# Altium PCB ip_phone_pcb.PcbDoc (part 3 of 4)
Units mil, origin at the board's own origin, x right, y up, seen from the top; angles counter-clockwise.
Board outline 2401.57 x 6885.83 mil, 6 copper layers (Component Side, Ground Plane, Inner Layer 1, Inner Layer 2, Power Plane, Solder Side), stack 60.4 mil thick; 371 components, 298 nets, 1249 pads, 735 vias.
Unrouted connection lines stored in the file: 81.
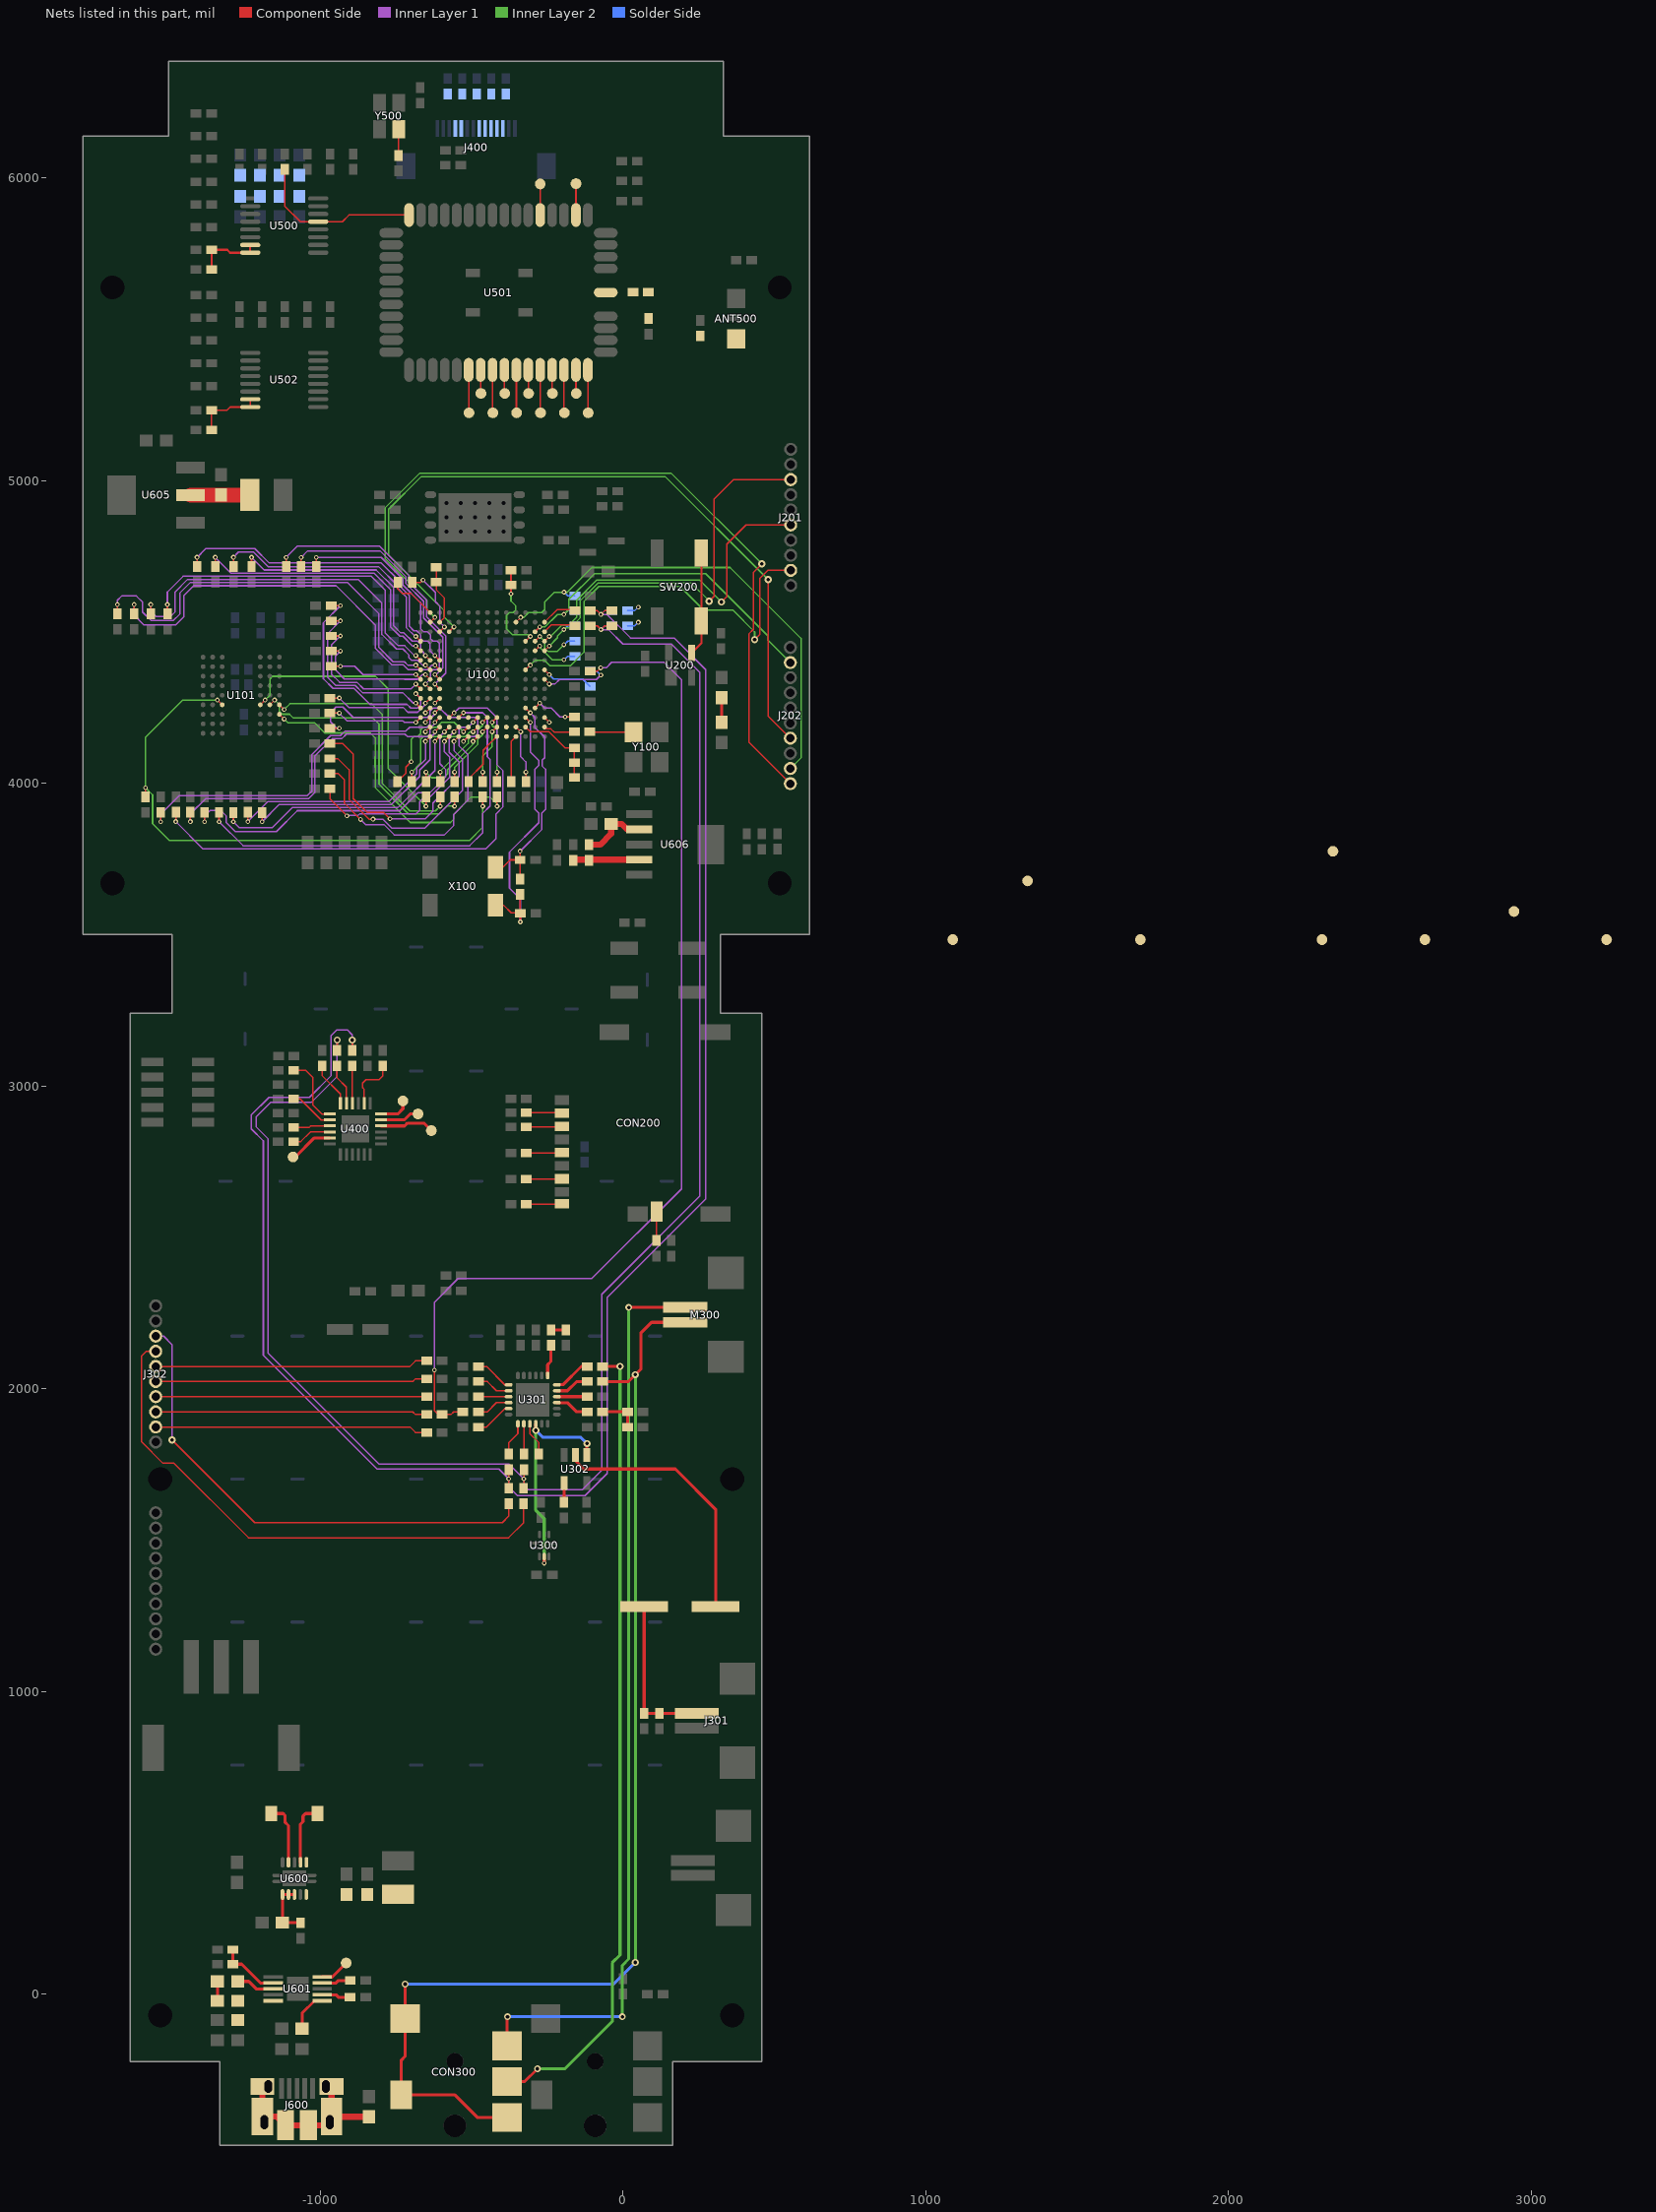
[diagram p7: the nets of this part, all layers, seen from the top]

## Via types
v1: diameter 15.75, hole 7.87, Component Side to Solder Side, tented top, 367 vias
v2: diameter 23.62, hole 11.81, Component Side to Solder Side, 261 vias
v3: diameter 23.62, hole 11.81, Component Side to Solder Side, tented bottom, 44 vias
v4: diameter 31.5, hole 15.75, Component Side to Solder Side, 28 vias
v5: diameter 25.98, hole 12.99, Component Side to Solder Side, tented top, 8 vias
v6: diameter 15.75, hole 7.87, Component Side to Solder Side, 6 vias
v7: diameter 23.62, hole 11.81, Component Side to Solder Side, tented top, 6 vias
v8: diameter 17.72, hole 11.81, Component Side to Solder Side, 5 vias
v9: diameter 19.68, hole 19.68, Component Side to Solder Side, 5 vias
v10: diameter 23.62, hole 11.81, Component Side to Solder Side, tented both sides, 4 vias
v11: diameter 31.5, hole 15.75, Component Side to Solder Side, tented bottom, 1 vias

## Nets (pads, with @x,y where several pads share a name; then routed paths per layer and width w, separated by ;. In a path a pad name is that pad's centre, name@x,y a point inside that pad or via, vN(x,y) a via of type N, cw(c..) or ccw(c..) an arc to the next point about the centre after c; other vN are vias at no path point) (continued)
MDIO: J202.2 R209.2 U100.B3 | length 1112.9
  Component Side w5: U100.B3@-290.53,4501.36 v1(-274.78,4517.11)
  Inner Layer 2 w5: v1(-274.78,4517.11) -257.49,4517.11 -216.21,4558.39 v1(-194.9,4558.39) -178.6,4574.69 -178.6,4608.39 -93.6,4693.39 273.11,4693.39 479.97,4486.54 479.97,4472.39 J202.2@552.97,4399.39
  Solder Side w5: v1@-194.09,4558.39 -182.09,4570.39 R209.2@-159.03,4570.39
MONOOUT: U300.9 U301.16 U302.1 | length 719.4
  Component Side w10: v7(-288.2,1862.6) U301.16@-288.2,1884.33 ; v6(-260.2,1424.06) U300.9@-260.2,1445.79 ; U302.1@-119.64,1780.65 -119.04,1781.25 v2(-119.04,1819.06)
  Inner Layer 2 w10: v7(-288.2,1862.6) -288.2,1598.6 -260.2,1570.6 v6(-260.2,1424.06)
  Solder Side w10: v7(-288.2,1862.6) -265.5,1839.9 -139.89,1839.9 v2(-119.04,1819.06)
NetANT500_A: ANT500.A C505.2 C506.2 R500.1
NetC101_2: C101.2 R137.1 R143.2 U100.C13 | length 288.1
  Component Side w5: U100.C13@-322.02,4186.4 -305.9,4170.28 -244.11,4170.28 -191.69,4117.85 R143.2@-160.36,4117.85 C101.2@-160.36,4019.85
NetC109_2: C109.2 R145.1 U100.C11 X100.1 | length 725.3
  Component Side w5: X100.1@-420.85,3723.39 -396.44,3723.39 -372.44,3747.39 C109.2@-340.03,3747.39 ; v1(-340.03,3776.2) C109.2@-340.03,3747.39 ; R145.1@-339.85,3684.39 -339.85,3747.21 C109.2@-340.03,3747.39 ; U100.C11@-322.02,4249.39 v1(-306.28,4233.65)
  Inner Layer 1 w5: v1(-340.03,3776.2) -267.83,3848.39 -267.83,3902.57 -257.03,3913.37 -256.47,3913.37 -255.83,3914 -255.83,4047.04 -267.15,4058.35 -267.15,4076.75 -258.83,4085.06 -258.83,4153 -290.9,4185.07 -290.9,4218.27 v1(-306.28,4233.65)
NetC110_2: C110.2 R145.2 U100.C12 X100.4 | length 942.6
  Component Side w5: X100.4@-420.85,3597.41 -394.24,3597.41 -369.05,3572.21 C110.2@-339.85,3572.21 ; R145.2@-339.85,3633.21 C110.2@-339.85,3572.21 ; v1(-339.03,3542.59) C110.2@-339.03,3571.39 C110.2@-339.85,3572.21 ; U100.C12@-322.02,4217.9 v1(-306.28,4202.15)
  Inner Layer 1 w5: v1(-339.03,3542.59) -339.03,3618.2 -374.83,3654 -374.83,3773 -277.83,3870 -277.83,3902.05 -291.83,3916.05 -291.83,4045.55 -277.83,4059.55 -277.83,4075.55 -306.28,4103.99 v1(-306.28,4202.15)
NetC304_2: C304.2 R304.1 | length 49.3
  Component Side w5: R304.1@-238.2,2194.96 R304.1@-238.13,2194.89
  Component Side w10: R304.1@-238.13,2194.89 C304.2@-188.93,2194.89
NetC305_1: C305.1 U301.24 | length 125.1
  Component Side w10: U301.24@-218.32,2013.27 -198.02,2013.27 -137.39,2073.9 C305.1@-118.32,2073.9
NetC305_2: C305.2 CON300.3 | length 2662
  Component Side w10: CON300.3@-382.83,-289.11 -325.11,-289.11 v2(-282.45,-246.45) ; C305.2@-67.14,2073.9 v2(-9.8,2073.9)
  Inner Layer 2 w10: v2(-282.45,-246.45) -191.45,-246.45 -35.45,-90.45 -35.45,103.55 -9.8,129.2 v2(-9.8,2073.9)
NetC306_1: C306.1 U301.23 | length 112.6
  Component Side w10: U301.23@-218.32,1993.58 -183.32,1993.58 -153,2023.9 C306.1@-118.32,2023.9
NetC306_2: C306.2 CON300.1 CON300.2 CON300.4 M300.2 | length 3905.6
  Component Side w10: v2(-719.45,33) -719.45,-205.45 -732.24,-218.24 CON300.4@-732.24,-332.42 -556.48,-332.42 -481.68,-407.22 CON300.1@-382.83,-407.22 ; C306.2@-67.14,2023.9 17.96,2023.9 57.45,2063.39 ; 58.76,2064.29 58.76,2183.9 94.53,2219.67 M300.2@205.96,2219.67
  Inner Layer 2 w10: v10(40.82,104.82) v2(40.82,2046.75)
  Solder Side w10: v2(-719.45,33) -31,33 v10(40.82,104.82)
NetC307_2: C307.2 U301.22 | length 100
  Component Side w10: U301.22@-218.32,1973.9 C307.2@-118.32,1973.9
NetC308_1: C308.1 U302.2 | length 870
  Component Side w10: U302.2@-157.04,1780.65 -157.04,1762.27 -129.83,1735.06 172.96,1735.06 306.18,1601.83 C308.1@306.18,1279.89
NetC308_2: C308.2 C309.2 J301.1 R318.1 | length 524.7
  Component Side w10: C308.2@69.96,1279.89 69.96,929.85 71.96,927.85 C309.2@106.96,927.85 ; C309.2@107.16,928.06 J301.1@243.96,928.06
NetC400_1: C400.1 J400.12
NetC401_1: C401.1 J400.11
NetC402_1: C402.1 J400.10
NetC403_1: C403.1 J400.9
NetC404_1: C404.1 J400.8
NetC507_2: C507.2 R501.1 U500.15 U500.16 | length 222.4
  Component Side w7: C507.2@-1359.09,5698.23 R501.1@-1359.09,5763.23 -1307.23,5763.23 -1297.52,5753.52 U500.16@-1231.31,5753.52 U500.15@-1231.31,5779.11
NetC508_2: C508.2 R514.1 U502.15 U502.16 | length 222.6
  Component Side w5: C508.2@-1359.09,5168.23 R514.1@-1359.09,5233.23 -1308.2,5233.23 -1297.91,5243.52 U502.16@-1231.31,5243.52 U502.15@-1231.31,5269.11
NetC601_2: C601.2 C602.2 R601.1 U600.1 U600.10
NetC603_2: C603.2 R602.1 U600.6 U600.7 U600.8 | length 191.4
  Component Side w10: U600.8@-1085.28,329.22 U600.7@-1104.96,329.22 U600.6@-1124.65,329.22 -1124.65,236.78 R602.1@-1124.91,236.52 C603.2@-1065.72,236.52
NetC636_2: C636.2 R611.1 U605.2 | length 195.2
  Component Side w20: R611.1@-1234.13,4952.44 R611.1@-1233.13,4953.44
  Component Side w50: U605.2@-1427.96,4952.44 R611.1@-1234.13,4952.44
NetCON200_2: CON200.2 R232.2 | length 115.1
  Component Side w5: R232.2@-319.16,2912.62 CON200.2@-204.09,2912.62
NetCON200_3: CON200.3 R234.2 | length 115.9
  Component Side w5: R234.2@-319.16,2865.62 CON200.3@-203.28,2865.62
NetCON200_5: CON200.5 R231.2 | length 116.5
  Component Side w5: R231.2@-319.16,2779.62 CON200.5@-202.66,2779.62
NetCON200_7: CON200.7 R233.2 | length 116.1
  Component Side w5: R233.2@-319.16,2692.62 CON200.7@-203.05,2692.62
NetCON200_9: CON200.9 R235.2 | length 115.8
  Component Side w5: R235.2@-319.16,2609.62 CON200.9@-203.37,2609.62
NetCON200_10: CON200.10 R236.2 | length 95.6
  Component Side w5: R236.2@111.16,2489.98 CON200.10@111.16,2585.57
NetCON300_5: CON300.5 M300.1 | length 3015.5
  Component Side w10: CON300.5@-382.83,-171 -382.83,-75.83 v2(-381.45,-74.45) ; v3(18.96,2268.88) M300.1@205.96,2268.88
  Inner Layer 2 w10: v2(-2.07,-74.45) -2.07,94.88 18.96,115.91 v3(18.96,2268.88)
  Solder Side w10: v2(-381.45,-74.45) v2(-2.07,-74.45)
NetD200_1: D200.1 R200.1 | length 81.7
  Component Side w5: R200.1@326,4201.89 R200.1@326.32,4202.21
  Component Side w10: R200.1@326.32,4202.21 D200.1@326.32,4283.49
NetD201_1: D201.1 R210.1
NetD202_1: D202.1 R211.1
NetD203_1: D203.1 R212.1
NetD204_1: D204.1 R213.1
NetD600_1: D600.1 R600.1 | length 64
  Component Side w10: R600.1@-1339.63,-22.02 D600.1@-1339.63,41.98
NetD600_2: D600.2 U601.8 | length 127.9
  Component Side w10: D600.2@-1272.7,41.98 -1236.35,41.98 -1211.72,17.35 U601.8@-1155.05,17.35
NetJ302_3: J302.3 R327.1 | length 1656
  Component Side w5: v10(-1489.58,1831.06) -1216.22,1557.71 -398.64,1557.71 -377.85,1578.5 R327.1@-377.85,1620.49
  Inner Layer 1 w5: J302.3@-1543.63,2173.9 -1517.58,2173.9 -1489.58,2145.9 v10(-1489.58,1831.06)
NetJ302_4: J302.4 R328.1 | length 1813.7
  Component Side w5: J302.4@-1543.63,2123.9 -1574.74,2123.9 -1589.93,2108.71 -1589.93,1824.21 -1520.93,1755.21 -1484.43,1755.21 -1236.93,1507.71 -377.93,1507.71 -327.85,1557.79 R328.1@-327.85,1620.49
NetJ302_5: J302.5 R329.1 | length 902.5
  Component Side w5: J302.5@-1543.63,2073.9 -703.69,2073.9 -685.58,2092.01 R329.1@-648.63,2092.01
NetJ302_6: J302.6 R330.1 | length 898.8
  Component Side w5: J302.6@-1543.63,2023.9 -694.63,2023.9 -685.58,2032.95 R330.1@-648.63,2032.95
NetJ302_7: J302.7 R331.1 | length 895
  Component Side w5: J302.7@-1543.63,1973.9 R331.1@-648.63,1973.9
NetJ302_8: J302.8 R332.1 | length 898.8
  Component Side w5: J302.8@-1543.63,1923.9 -694.63,1923.9 -685.58,1914.84 R332.1@-648.63,1914.84
NetJ302_9: J302.9 R333.1 | length 902.5
  Component Side w5: J302.9@-1543.63,1873.9 -703.69,1873.9 -685.58,1855.79 R333.1@-648.63,1855.79
NetJ400_4: J400.4 R401.2 | length 40
  Solder Side w5: R401.2@15.15,4570.39 38.21,4570.39 v1@50.21,4582.39
  other v1: 51.02,4582.39
NetJ400_5: J400.5 R403.2 | length 40
  Solder Side w5: R403.2@15.15,4520.39 38.21,4520.39 v1@50.21,4532.39
  other v1: 51.02,4532.39
NetJ600_6: J600.6 L602.1 | length 574.7
  Component Side w20: J600.6@-1190.99,-305.22 J600.6@-1190.99,-404.63 -1143.26,-404.63 J600.6@-1114.71,-433.17 J600.6@-1038.93,-433.17 -991.19,-433.17 J600.6@-962.65,-404.63 ; J600.6@-962.65,-305.22 J600.6@-962.65,-404.63 ; L602.1@-839,-405.11 -962.17,-405.11 J600.6@-962.65,-404.63
NetL600_1: L600.1 U600.4 | length 207.8
  Component Side w10: L600.1@-1162.05,596.52 -1122.52,596.52 -1117,591 -1117,569 -1104.96,556.96 U600.4@-1104.96,435.52
NetL600_2: L600.2 U600.2 | length 208.1
  Component Side w10: U600.2@-1065.59,435.52 -1065.59,561.41 -1057,570 -1057,588 -1048.48,596.52 L600.2@-1008.5,596.52
NetR100_2: R100.2 U100.K14 | length 838
  Component Side w5: R100.2@-967.85,4081.02 R100.2@-967.85,4082.35 -966.51,4081.02 -940.85,4081.02 -904.83,4045 -904.83,3947.83 -839,3882 v1(-825.83,3882) ; v1(-558.24,4139.16) U100.K14@-542.5,4154.91
  Inner Layer 1 w5: v1(-825.83,3882) -793.46,3882 -764.46,3853 -653.84,3853 -530.83,3976.01 -530.83,4040.69 -530.83,4081 -537.15,4087.31 -558.24,4108.41 v1(-558.24,4139.16)
NetR101_1: R101.1 U100.M9 | length 939.2
  Component Side w5: R101.1@-1112.96,4716.14 R101.1@-1112.96,4716.35 v1(-1112.96,4746.8) ; v1(-621.24,4328.13) U100.M9@-605.49,4312.39
  Inner Layer 1 w5: v1(-1112.96,4746.8) -1075.45,4784.31 -804.07,4784.31 -706.74,4686.97 -706.74,4664.12 -648.85,4606.24 -648.85,4551.07 -585.15,4487.36 -585.15,4364.22 v1(-621.24,4328.13)
NetR102_2: R102.2 U100.K13 | length 881.1
  Component Side w5: R102.2@-967.85,4132.35 -926.19,4132.35 -891,4097.17 -891,3950 -846,3905 -791.83,3905 v1(-769.83,3883) ; v1(-558.24,4170.65) U100.K13@-542.5,4186.4
  Inner Layer 1 w5: v1(-769.83,3883) -652.83,3883 -627.83,3908 -627.83,3935.59 -540.83,4022.59 -540.83,4069.87 -573.99,4103.03 -573.99,4154.91 v1(-558.24,4170.65)
NetR103_1: R103.1 U100.N9 | length 807.2
  Component Side w5: R103.1@-1012.96,4716.14 R103.1@-1012.96,4716.35 v1(-1012.96,4746.8) ; v1(-652.73,4328.13) U100.N9@-636.98,4312.39
  Inner Layer 1 w5: v1@-1012.84,4746.92 v1(-1012.96,4746.8) -798.71,4746.8 -726.74,4674.83 -726.74,4655.84 -668.85,4597.95 -668.85,4511.49 -659.1,4501.74 -647.11,4501.74 -636.61,4491.23 -636.61,4479.25 -627.6,4470.24 -614.15,4470.24 -605.86,4461.95 -605.86,4384.76 -614.87,4375.75 -626.86,4375.75 -636.61,4366 -636.61,4344.26 v1(-652.73,4328.13)
NetR104_2: R104.2 U100.H12 | length 978.1
  Component Side w5: R104.2@-967.85,4032.35 -940.19,4032.35 -919.83,4012 -919.83,3934 v1(-866.83,3881) ; v1(-495.25,4202.15) U100.H12@-479.5,4217.9
  Inner Layer 1 w5: v1(-866.83,3881) -849.83,3864 -805.81,3864 -805.7,3864.11 -789.71,3864.11 -755.6,3830 -589.83,3830 -558.83,3861 -558.83,3898 -513,3943.83 -513,4013.39 -513,4095.88 -521.12,4104 -542.12,4125 -542.12,4177.02 -533.12,4186.03 -511.37,4186.03 v1(-495.25,4202.15)
NetR105_1: R105.1 U100.M8 | length 830.3
  Component Side w5: R105.1@-1062.96,4716.14 R105.1@-1062.96,4716.35 v1(-1062.96,4746.8) ; v1(-621.24,4359.63) U100.M8@-605.49,4343.88
  Inner Layer 1 w5: v1(-1062.96,4746.8) -1041.52,4768.24 -802.15,4768.24 -716.74,4682.83 -716.74,4659.98 -658.85,4602.09 -658.85,4546.93 -595.15,4483.22 -595.15,4381.33 -616.85,4359.63 v1(-621.24,4359.63)
NetR106_2: R106.2 U100.L14 | length 669
  Component Side w5: R106.2@-967.85,3982.35 -967.85,3949.02 v1(-911.83,3893) ; v1(-589.74,4139.16) U100.L14@-573.99,4154.91
  Inner Layer 1 w5: v1(-911.83,3893) -910.83,3894 -875.58,3894 -870.58,3899 -684.83,3899 -671.83,3912 -671.83,3939 -655.44,3955.39 -637.32,3955.39 -572.22,4020.48 -572.22,4043.6 -572.22,4087.12 -589.74,4104.64 v1(-589.74,4139.16)
NetR107_1: R107.1 U100.P11 | length 583.5
  Component Side w5: R107.1@-964.03,4537.35 v1(-933.37,4537.35) ; v1(-684.23,4265.14) U100.P11@-668.48,4249.39
  Inner Layer 1 w5: v1(-933.37,4537.35) -975.15,4495.58 -975.15,4350.24 -949.15,4324.24 -885,4324.24 -861,4300.24 -728.15,4300.24 -693.05,4265.14 v1(-684.23,4265.14)
NetR108_2: R108.2 U100.M14 | length 901.6
  Component Side w5: v1(-1287.15,3873.39) R108.2@-1287.15,3904.06 ; v1(-621.24,4139.16) U100.M14@-605.49,4154.91
  Inner Layer 1 w5: v1(-1287.15,3873.39) -1267.83,3854.08 -1158.75,3854.08 -1092.83,3920 -743.83,3920 -621.24,4042.6 v1(-621.24,4139.16) v1@-621.15,4139.07
NetR109_1: R109.1 U100.P10 | length 727.6
  Component Side w5: R109.1@-964.03,4587.35 v1(-933.37,4587.35) ; v1(-684.23,4296.64) U100.P10@-668.48,4280.89
  Inner Layer 1 w5: v1(-933.37,4587.35) -989.62,4531.1 -989.62,4345.71 -958.15,4314.24 -889.15,4314.24 -836.17,4261.26 -713.17,4261.26 -700.93,4249.02 -678.61,4249.02 -668.15,4259.48 -668.15,4280.56 v1(-684.23,4296.64)
NetR110_2: R110.2 U100.L13 | length 1155.1
  Component Side w5: v1(-1382.15,3873.57) R110.2@-1382.15,3904.24 ; v1(-589.74,4170.65) U100.L13@-573.99,4186.4
  Inner Layer 1 w5: v1(-1382.15,3873.57) -1382.15,3892.24 -1364.24,3910.14 -1328.14,3910.14 -1310.15,3892.15 -1310.15,3870.24 -1280.91,3841 -1144.83,3841 -1075.83,3910 -736.83,3910 -676.83,3970 -636.85,3970 -586.15,4020.71 -586.15,4046.42 -605.11,4065.39 -605.11,4155.22 v1(-589.74,4170.65)
NetR111_1: R111.1 U100.N8 | length 437.8
  Component Side w5: R111.1@-964.03,4437.35 v1(-933.37,4437.35) ; v1(-652.73,4359.63) U100.N8@-636.98,4343.88
  Inner Layer 1 w5: v1(-933.37,4437.35) -949.15,4421.58 -949.15,4374.24 -920.17,4345.26 -723.13,4345.26 -722.13,4344.26 -677.86,4344.26 -662.49,4359.63 v1(-652.73,4359.63)
NetR112_2: R112.2 U100.N14 | length 795.3
  Component Side w5: v1(-1239.1,3873.86) R112.2@-1239.1,3904.52 ; v1(-652.73,4139.16) U100.N14@-636.98,4154.91
  Inner Layer 1 w5: v1(-1239.1,3873.86) -1172.96,3940 -773.16,3940 -681.83,4031.33 -681.83,4049.55 -652.73,4078.65 v1(-652.73,4139.16)
NetR113_1: R113.1 U100.P9 | length 497.2
  Component Side w5: R113.1@-964.03,4487.35 v1(-933.37,4487.35) ; v1(-684.23,4328.13) U100.P9@-668.48,4312.39
  Inner Layer 1 w5: v1(-933.37,4487.35) -963.15,4457.58 -963.15,4361.24 -936.15,4334.24 -879.29,4334.24 -857.29,4312.24 -700.13,4312.24 v1(-684.23,4328.13)
NetR114_2: R114.2 U100.K12 | length 1454.4
  Component Side w5: v1(-1334.33,3873.67) R114.2@-1334.33,3904.33 ; U100.K12@-542.5,4217.9 v1(-526.75,4233.65)
  Inner Layer 1 w5: v1(-1334.33,3873.67) -1254.9,3794.24 -506.15,3794.24 -464.15,3836.24 -464.15,3900.24 -439.15,3925.24 -439.15,4038.24 -439.15,4079.27 -448.01,4088.14 -448.01,4217.9 -463.76,4233.65 v1(-526.75,4233.65)
NetR115_1: R115.1 U100.P8 | length 313.6
  Component Side w5: R115.1@-964.03,4387.35 v1(-933.37,4387.35) ; v1(-684.23,4359.63) U100.P8@-668.48,4343.88
  Inner Layer 1 w5: v1(-933.37,4387.35) -933.25,4387.24 -886.15,4387.24 -858.54,4359.63 v1(-684.23,4359.63)
NetR116_2: R116.2 U100.L12 | length 1741
  Component Side w5: v1(-1477.33,3873.98) R116.2@-1477.33,3904.65 ; U100.L12@-573.62,4217.52 v1(-557.87,4233.27)
  Inner Layer 1 w5: v1(-1477.33,3873.98) -1387.59,3784.24 -453.15,3784.24 -419.83,3817.55 -419.83,3899.01 -396.15,3922.7 -396.15,4041.94 -416.89,4062.68 -416.89,4218.27 -447.85,4249.24 -541.91,4249.24 v1(-557.87,4233.27)
NetR117_1: R117.1 U100.P7 | length 1382.2
  Component Side w5: R117.1@-1670.03,4560.35 v1(-1670.03,4591.02) ; v1(-684.23,4391.13) U100.P7@-668.48,4375.38
  Inner Layer 1 w5: v1(-1670.03,4591.02) -1670.03,4605.35 -1656.15,4619.24 -1607.15,4619.24 -1587.15,4599.24 -1587.15,4566.24 -1559.15,4538.24 -1485.15,4538.24 -1464.15,4559.24 -1464.15,4629.24 -1430.15,4663.24 -909.15,4663.24 -806.15,4560.24 -806.15,4449.24 -759.17,4402.26 -722.31,4402.26 -711.17,4391.13 v1(-684.23,4391.13)
NetR118_2: R118.2 U100.M13 | length 803.8
  Component Side w5: v1(-1192.15,3873.39) R118.2@-1192.15,3904.06 ; v1(-621.24,4170.65) U100.M13@-605.49,4186.4
  Inner Layer 1 w5: v1(-1192.15,3873.39) -1135.54,3930 -764.83,3930 -671.83,4023 -671.83,4044 -637.36,4078.48 -637.36,4150.14 -621.24,4166.27 v1(-621.24,4170.65)
NetR119_1: R119.1 U100.N7 | length 1261.5
  Component Side w5: R119.1@-1560.03,4560.35 v1(-1560.03,4591.02) ; v1(-652.73,4391.13) U100.N7@-636.98,4375.38
  Inner Layer 1 w5: v1(-1560.03,4591.02) -1560.03,4569.12 -1543.15,4552.24 -1494.15,4552.24 -1479.15,4567.24 -1479.15,4633.24 -1438.15,4674.24 -874.6,4674.24 -796.15,4595.78 -796.15,4492.24 -748.15,4444.24 -727.15,4444.24 -708.15,4425.24 -708.15,4416.24 -698.41,4406.5 -677.86,4406.5 -662.49,4391.13 v1(-652.73,4391.13)
NetR120_2: R120.2 U100.J14 | length 768.2
  Component Side w5: R120.2@-967.85,4182.35 v1(-937.19,4182.35) ; v1(-526.75,4139.16) U100.J14@-511,4154.91
  Inner Layer 1 w5: v1(-937.19,4182.35) -945.26,4182.35 -966.15,4203.24 -966.15,4234.06 -947.97,4252.24 -925.15,4252.24 -891.18,4218.27 -646.36,4218.27 -637.36,4227.28 -637.36,4239.27 -627.23,4249.39 -605.49,4249.39 -573.99,4217.9 -489.26,4217.9 -479.13,4207.77 -479.13,4165.03 -489.63,4154.53 -511.37,4154.53 v1(-526.75,4139.16)
NetR121_1: R121.1 U100.M7 | length 1355.5
  Component Side w5: R121.1@-1615.03,4560.35 v1(-1615.03,4591.02) ; v1(-621.24,4391.13) U100.M7@-605.49,4375.38
  Inner Layer 1 w5: v1(-1615.03,4591.02) -1615.03,4556.12 -1583.15,4524.24 -1477.15,4524.24 -1451.15,4550.24 -1451.15,4620.24 -1418.15,4653.24 -947.6,4653.24 -818.63,4524.26 -818.63,4447.57 -763.32,4392.26 -726.45,4392.26 -709.94,4375.75 -646.36,4375.75 -630.99,4391.13 v1(-621.24,4391.13)
NetR122_2: R122.2 U100.M12 | length 1101.7
  Component Side w5: v1(-1429.1,3873.86) R122.2@-1429.1,3904.52 ; v1(-621.24,4202.15) U100.M12@-605.49,4217.9
  Inner Layer 1 w5: v1(-1429.1,3873.86) -1429.1,3899.28 -1378.38,3950 -1038.24,3950 -1018.15,3970.09 -1018.15,4090.24 -960.65,4147.73 -929.42,4147.73 -913.91,4163.24 -720.15,4163.24 -711.81,4154.91 -646.74,4154.91 -636.98,4164.66 -636.98,4182.01 -621.24,4197.76 v1(-621.24,4202.15)
NetR123_1: R123.1 U100.P6 | length 1127.5
  Component Side w5: R123.1@-1505.03,4560.35 v1(-1505.03,4591.02) ; v1(-684.23,4422.62) U100.P6@-668.48,4406.87
  Inner Layer 1 w5: v1(-1505.03,4591.02) -1505.03,4632.35 -1453.15,4684.24 -831.15,4684.24 -786.15,4639.24 -786.15,4498.24 -742.77,4454.86 -720.86,4454.86 -688.62,4422.62 v1(-684.23,4422.62)
NetR124_2: R124.2 U100.M11 | length 1206
  Component Side w5: v1(-1527.15,3873.57) R124.2@-1527.15,3904.24 ; v1(-621.24,4233.65) U100.M11@-605.49,4249.39
  Inner Layer 1 w5: v1(-1527.15,3873.57) -1527.15,3898.24 -1465.38,3960 -1042.38,3960 -1028.15,3974.24 -1028.15,4095.22 -965.64,4157.73 -933.56,4157.73 -918.05,4173.24 -717.15,4173.24 -704.35,4186.03 -647.11,4186.03 -637.36,4195.78 -637.36,4213.14 -621.24,4229.26 v1(-621.24,4233.65)
NetR125_1: R125.1 U100.M6 | length 1086.6
  Component Side w5: R125.1@-1407.03,4716.35 v1(-1407.03,4747.02) ; v1(-621.24,4422.62) U100.M6@-605.49,4406.87
  Inner Layer 1 w5: v1(-1407.03,4747.02) -1377.81,4776.24 -1216.15,4776.24 -1168.15,4728.24 -798.15,4728.24 -736.74,4666.83 -736.74,4651.7 -706.15,4621.1 -706.15,4519.44 -691.15,4504.44 -681.31,4504.44 -668.85,4491.98 -668.85,4479.99 -659.1,4470.24 -645.15,4470.24 -637.15,4462.24 -637.15,4438.53 v1(-621.24,4422.62)
NetR126_2: R126.2 U100.N10 | length 371.9
  Component Side w5: R126.2@-967.85,4282.35 v1(-937.19,4282.35) ; v1(-652.73,4265.14) U100.N10@-636.98,4280.89
  Inner Layer 1 w5: v1(-937.19,4282.35) -906.1,4251.26 -726.45,4251.26 -710.42,4235.24 -678.25,4235.24 -652.73,4260.75 v1(-652.73,4265.14)
NetR127_1: R127.1 U100.N6 | length 848.6
  Component Side w5: R127.1@-1227.03,4716.35 v1(-1227.03,4747.02) ; v1(-652.73,4422.62) U100.N6@-636.98,4406.87
  Inner Layer 1 w5: v1(-1227.03,4747.02) -1185.25,4705.24 -815.15,4705.24 -758.15,4648.24 -758.15,4521.47 -734.16,4497.49 -723.4,4497.49 -696.15,4470.24 -678.61,4470.24 -668.85,4460.49 -668.85,4443.13 -658.85,4433.13 -658.85,4428.74 v1(-652.73,4422.62)
NetR128_2: R128.2 U100.P12 | length 318.4
  Component Side w5: R128.2@-967.85,4232.35 v1(-937.19,4232.35) ; v1(-684.23,4202.15) U100.P12@-668.48,4217.9
  Inner Layer 1 w5: v1(-937.19,4232.35) -912.36,4207.52 -727.43,4207.52 -722.06,4202.15 v1(-684.23,4202.15)
NetR129_1: R129.1 U100.P5 | length 909.6
  Component Side w5: R129.1@-1347.03,4716.35 v1(-1347.03,4747.02) ; v1(-684.23,4454.12) U100.P5@-668.48,4438.37
  Inner Layer 1 w5: v1(-1347.03,4747.02) -1294.25,4694.24 -821.15,4694.24 -768.15,4641.24 -768.15,4517.33 -737.05,4486.24 -727.15,4486.24 -695.03,4454.12 v1(-684.23,4454.12)
NetR130_1: R130.1 U100.P4 | length 842.7
  Component Side w5: R130.1@-1287.03,4716.35 v1(-1287.03,4747.02) ; v1(-684.23,4485.61) U100.P4@-668.48,4469.87
  Inner Layer 1 w5: v1(-1287.03,4747.02) -1269.81,4764.24 -1220.15,4764.24 -1172.15,4716.24 -807.09,4716.24 -746.74,4655.89 -746.74,4647.55 -716.15,4616.96 -716.15,4515.3 -686.46,4485.61 v1(-684.23,4485.61)
NetR131_1: R131.1 U100.J13 | length 396.4
  Component Side w5: R131.1@-744.85,4006.39 -717.44,4033.8 -717.44,4054.26 v1(-699.83,4071.87) ; v1(-526.75,4170.65) U100.J13@-511,4186.4
  Inner Layer 2 w5: v1(-699.83,4071.87) -699.6,4072.1 -699.6,4145.53 -690.6,4154.53 -678.61,4154.53 -668.85,4164.29 -668.85,4176.27 -659.1,4186.03 -615.62,4186.03 -599.64,4202 -558.09,4202 v1(-526.75,4170.65)
NetR132_1: R132.1 U100.H13 | length 357
  Component Side w5: R132.1@-697.85,4006.39 v1(-697.85,4037.05) ; v1(-495.25,4170.65) U100.H13@-479.5,4186.4
  Inner Layer 2 w5: v1(-697.85,4037.05) -668.11,4066.8 -668.11,4145.53 -658.35,4155.28 -520.38,4155.28 -505.01,4170.65 v1(-495.25,4170.65)
NetR133_1: R133.1 U100.F14 | length 187.2
  Component Side w5: R133.1@-509.85,4006.39 -509.85,4015.98 -461.83,4064 -461.83,4109.58 -432.26,4139.16 U100.F14@-416.51,4154.91
NetR134_2: R134.2 U100.G12 | length 282.9
  Component Side w5: R134.2@-603.85,4006.57 v1(-603.85,4037.24) ; v1(-463.76,4202.15) U100.G12@-448.01,4217.9
  Inner Layer 2 w5: v1(-603.85,4037.24) -603.85,4040.31 -550.16,4094 -511.37,4132.79 -511.37,4144.78 -500.87,4155.28 -488.88,4155.28 -479.88,4164.29 -479.88,4176.27 -463.76,4192.4 v1(-463.76,4202.15)
NetR135_1: R135.1 U100.D14 | length 154.9
  Component Side w5: R135.1@-368.85,4006.39 -368.85,4139.57 U100.D14@-353.52,4154.91
NetR136_2: R136.2 U100.H14 | length 279
  Component Side w5: R136.2@-650.85,4006.57 v1(-650.85,4037.24) ; v1(-495.25,4139.16) U100.H14@-479.5,4154.91
  Inner Layer 2 w5: v1(-650.85,4037.24) -632.61,4019 -593,4019 -579,4033 -579,4046 -495.25,4129.75 -495.25,4134.77 v1(-495.25,4139.16)
NetR138_2: R138.2 U100.G13 | length 224.9
  Component Side w5: R138.2@-556.85,4006.57 v1(-556.85,4037.24) ; v1(-463.76,4170.65) U100.G13@-448.01,4186.4
  Inner Layer 2 w5: v1(-556.85,4037.24) -556.85,4051.98 -479.13,4129.7 -479.13,4145.53 -463.76,4160.9 v1(-463.76,4170.65)
NetR139_1: R139.1 Y100.3 | length 144.4
  Component Side w5: R139.1@-109.18,4170.39 -108.64,4169.85 Y100.3@35.02,4169.85
NetR139_2: R139.2 U100.A13 | length 105.6
  Component Side w5: U100.A13@-259.03,4186.4 -252.91,4180.28 -238.11,4180.28 -227.83,4170 -160.76,4170 R139.2@-160.36,4170.39
NetR140_2: R140.2 U100.F12 | length 224.6
  Component Side w5: v1(-432.26,4202.15) U100.F12@-416.51,4217.9 ; R140.2@-415.85,4006.57 v1(-415.85,4037.24)
  Inner Layer 2 w5: v1(-432.26,4202.15) -432.26,4192.4 -416.89,4177.02 -416.89,4038.27 v1(-415.85,4037.24)
NetR141_2: R141.2 U100.F13 | length 199
  Component Side w5: R141.2@-462.85,4006.57 v1(-462.85,4037.24) ; v1(-432.26,4170.65) U100.F13@-416.51,4186.4
  Inner Layer 2 w5: v1(-462.85,4037.24) -462.85,4091.24 -432.26,4121.83 -432.26,4160.9 v1(-432.26,4170.65)
NetR142_1: R142.1 U100.D13 | length 193.5
  Component Side w5: U100.D13@-353.52,4186.4 v1(-337.77,4170.65) ; R142.1@-320.85,4006.39 v1(-320.85,4037.05)
  Inner Layer 1 w5: v1(-337.77,4170.65) -337.77,4087.94 -320.85,4071.02 v1(-320.85,4037.05)
NetR146_2: R146.2 U100.B11 | length 155.4
  Component Side w5: U100.B11@-290.53,4249.39 v1(-274.78,4265.14) ; v1(-191.02,4219.99) R146.2@-160.36,4219.99
  Inner Layer 1 w5: v1(-274.78,4265.14) -258.66,4249.02 -236.92,4249.02 -207.89,4219.99 v1(-191.02,4219.99)
NetR202_1: R202.1 U100.A7 | length 173.1
  Component Side w5: U100.A7@-259.03,4375.38 v1(-243.28,4359.63)
  Solder Side w5: v1(-243.28,4359.63) -229.05,4345.39 -133.74,4345.39 R202.1@-108.74,4320.39
NetR204_1: R204.1 U100.A8 | length 245.2
  Component Side w5: U100.A8@-259.03,4343.88 v1(-243.28,4328.13)
  Inner Layer 1 w5: v1(-243.28,4328.13) -225.29,4328.13 -210.03,4343.39 -87.47,4343.39 v1(-72.87,4357.99)
  Solder Side w5: R204.1@-108.74,4370.39 -86.08,4370.39 v1@-73.68,4357.99
NetR214_2: R214.2 R215.2 U100.C4 | length 331.7
  Component Side w5: v1(-369.92,4626.5) R215.2@-369.92,4655.99 R214.2@-369.92,4704.99 ; U100.C4@-322.02,4469.87 v1(-306.28,4485.61)
  Inner Layer 2 w5: v1(-369.92,4626.5) -369.92,4602.5 -353.89,4586.47 -353.89,4573.73 -362.9,4564.73 -374.89,4564.73 -384.64,4554.97 -384.64,4510.74 -365.26,4491.36 -312.02,4491.36 v1(-306.28,4485.61)
NetR216_2: R216.2 U100.B4 | length 185.2
  Component Side w5: U100.B4@-290.53,4469.87 v1(-274.78,4485.61)
  Inner Layer 2 w5: v1(-274.78,4485.61) -258.66,4469.49 -258.66,4447.75 -246.3,4435.39 -217.9,4435.39 v1(-194.9,4458.39)
  Solder Side w5: v1@-194.09,4458.39 -182.09,4470.39 R216.2@-159.03,4470.39
NetR217_2: R217.2 U100.B5 | length 163.7
  Component Side w5: U100.B5@-290.53,4438.37 v1(-274.78,4454.12)
  Inner Layer 2 w5: v1(-274.78,4454.12) -274.78,4449.73 -233.44,4408.39 v1(-194.9,4408.39)
  Solder Side w5: v1@-194.09,4408.39 -182.09,4420.39 R217.2@-159.03,4420.39
NetR219_1: R219.1 U100.M3 | length 245.8
  Component Side w5: R219.1@-696.74,4663.99 -668.84,4663.99 v1(-660.83,4672) ; U100.M3@-605.49,4501.36 v1(-589.74,4517.11)
  Inner Layer 1 w5: v1(-660.83,4672) -619.74,4630.91 -619.74,4600.35 -605.49,4586.1 -605.49,4532.86 v1(-589.74,4517.11)
NetR220_1: R220.1 U100.N1 | length 160.6
  Component Side w5: R220.1@-743.74,4663.99 -743.74,4642.61 -728.39,4627.26 -699.89,4627.26 U100.N1@-636.98,4564.35
NetR221_1: R221.1 R222.2 U100.M2 | length 198.8
  Component Side w5: R221.1@-616.74,4713.99 -616.74,4639.91 -589.74,4612.91 -589.74,4548.61 U100.M2@-605.49,4532.86
NetR237_1: R237.1 U100.A2 | length 118.3
  Component Side w5: U100.A2@-259.03,4532.86 -218.12,4573.77 -162.41,4573.77 R237.1@-159.03,4570.39
NetR238_1: R238.1 U100.A3 | length 110.7
  Component Side w5: U100.A3@-259.03,4501.36 -236.63,4523.77 -162.41,4523.77 R238.1@-159.03,4520.39
NetR303_1: R303.1 U301.15 | length 112.6
  Component Side w5: U301.15@-307.89,1884.33 -307.89,1852.39 -277.57,1822.08 R303.1@-277.57,1784.33
NetR304_2: R304.2 U301.1 | length 104.4
  Component Side w10: U301.1@-248.83,2043.78 -248.83,2079.4 -238.2,2090.03 R304.2@-238.2,2143.78
NetR313_1: R313.1 U301.21 | length 112.6
  Component Side w10: U301.21@-218.32,1954.21 -183.32,1954.21 -153,1923.9 R313.1@-118.32,1923.9
NetR313_2: R313.2 R315.2 R316.2 | length 132.2
  Component Side w10: R313.2@-67.14,1923.9 R316.2@15.05,1923.9 R315.2@15.05,1873.9
NetR317_1: R317.1 U302.4 | length 63.2
  Component Side w10: R317.1@-194.44,1624.9 U302.4@-194.44,1688.13
NetR319_2: R319.2 U301.13 | length 112.6
  Component Side w5: R319.2@-377.57,1784.33 -377.57,1822.08 -347.26,1852.39 U301.13@-347.26,1884.33
NetR320_2: R320.2 U301.14 | length 100
  Component Side w5: R320.2@-327.57,1784.33 U301.14@-327.57,1884.33
NetR321_2: R321.2 U301.7 | length 125.1
  Component Side w5: R321.2@-477.77,2073.9 -450.7,2073.9 -390.07,2013.27 U301.7@-377.77,2013.27
NetR322_2: R322.2 U301.8 | length 118.5
  Component Side w5: R322.2@-483.67,2023.9 -448,2023.9 -417.68,1993.58 U301.8@-377.77,1993.58
NetR323_2: R323.2 U301.9 | length 100
  Component Side w5: R323.2@-477.77,1973.9 U301.9@-377.77,1973.9
NetR324_2: R324.2 U301.10 | length 118.5
  Component Side w5: R324.2@-483.67,1923.9 -448,1923.9 -417.68,1954.21 U301.10@-377.77,1954.21
NetR325_2: R325.2 U301.11 | length 125.1
  Component Side w5: R325.2@-477.77,1873.9 -450.7,1873.9 -390.07,1934.53 U301.11@-377.77,1934.53
NetR404_2: R404.2 U400.22 | length 123.5
  Component Side w5: U400.22@-894.12,2943.4 R404.2@-894.12,3066.89
NetR405_2: R405.2 U400.23 | length 136
  Component Side w5: R405.2@-944.12,3066.89 -944.12,3027.12 -913.8,2996.8 U400.23@-913.8,2943.4
NetR406_2: R406.2 U400.24 | length 148.6
  Component Side w5: R406.2@-994.12,3066.89 -994.12,3035.12 -933.49,2974.49 U400.24@-933.49,2943.4
NetR407_2: R407.2 U400.20 | length 178.1
  Component Side w5: U400.20@-854.75,2943.4 -854.75,2989.75 -860,2995 -860,3010 -849,3021 -806,3021 -794.12,3032.88 R407.2@-794.12,3066.89
NetR408_2: R408.2 U400.4 | length 132.1
  Component Side w5: R408.2@-1087.82,2816.89 -1064.11,2816.89 -1032.17,2848.83 U400.4@-969,2848.83
NetR409_2: R409.2 U400.3 | length 121.5
  Component Side w5: R409.2@-1087.82,2863.89 -1086.93,2863 -1037,2863 -1031.48,2868.52 U400.3@-969,2868.52
NetR410_2: R410.2 U400.2 | length 147.6
  Component Side w5: R410.2@-1087.82,2957.71 -1066.71,2957.71 -997.2,2888.2 U400.2@-969,2888.2
NetR411_2: R411.2 U400.1 | length 231.8
  Component Side w5: R411.2@-1087.82,3051.89 -1047.89,3051.89 -1024,3028 -1024,2937 -994.89,2907.89 U400.1@-969,2907.89
NetR500_2: R500.2 U501.48
NetR525_2: R525.2 Y500.3 | length 86.7
  Component Side w5: Y500.3@-741.01,6161.39 -741.01,6074.8 R525.2@-740.91,6074.7
NetR600_2: R600.2 R604.2 U601.10
NetR603_1: R603.1 U601.1 | length 134.5
  Component Side w10: R603.1@-1060,-114.11 -1060,-63 -1019.02,-22.02 U601.1@-993.63,-22.02
NetR605_2: R605.2 U601.2 | length 95.8
  Component Side w10: U601.2@-993.63,-2.33 -948.04,-2.33 -940.04,-10.33 R605.2@-901.18,-10.33
NetR606_1: R606.1 U601.4 | length 95.8
  Component Side w10: U601.4@-993.63,37.04 -948.04,37.04 -940.04,45.04 R606.1@-901.18,45.04
NetR607_2: R607.2 R608.1 U601.7 | length 207.1
  Component Side w10: R608.1@-1288.45,146.98 R607.2@-1288.45,98.98 -1259.63,98.98 -1197.68,37.04 U601.7@-1155.05,37.04
NetR612_2: R612.2 R613.2 U606.2 | length 222
  Component Side w20: R613.2@-112.85,3797.57 -75.26,3797.57 -38.92,3833.91 R612.2@-38.92,3866.39 -4.23,3866.39 13.77,3848.39 U606.2@54.15,3848.39
NetR613_1: R613.1 R615.2 U606.4 | length 219.9
  Component Side w20: R615.2@-164.85,3746.21 -162.67,3748.39 U606.4@54.15,3748.39
NetSW200_3: SW200.3 SW200.4 U200.3 | length 343.6
  Component Side w7: U200.3@226.87,4431.1 258.93,4463.17 SW200.3@258.93,4536.99 SW200.4@258.93,4761.4
NetTP100_1: TP100.1 U100.N12 | length 22.3
  Component Side w5: v1(-652.73,4202.15) U100.N12@-636.98,4217.9
NetTP101_1: TP101.1 U100.J12
NetTP102_1: TP102.1 U100.N11 | length 22.3
  Component Side w5: v1(-652.73,4233.65) U100.N11@-636.98,4249.39
NetTP103_1: TP103.1 U100.M10 | length 22.3
  Component Side w5: v1(-621.24,4265.14) U100.M10@-605.49,4280.89
NetTP104_1: TP104.1 U100.N13 | length 22.3
  Component Side w5: v1(-652.73,4170.65) U100.N13@-636.98,4186.4
NetTP105_1: TP105.1 U100.E13
NetTP106_1: TP106.1 U100.E14
NetTP107_1: TP107.1 U100.A12 | length 22.3
  Component Side w5: U100.A12@-259.03,4217.9 v1(-243.28,4202.15)
NetTP400_1: TP400.1 U400.5 | length 147.2
  Component Side w10: TP400.1@-1090,2765.89 -1082.41,2765.89 -1019.15,2829.15 U400.5@-969,2829.15
NetTP401_1: TP401.1 U400.18 | length 105.6
  Component Side w10: U400.18@-799.55,2907.89 -744.11,2907.89 -727,2925 TP401.1@-727,2951
NetTP402_1: TP402.1 U400.16 | length 180.8
  Component Side w10: U400.16@-799.55,2868.52 -721.27,2868.52 -711.79,2878 -658,2878 TP402.1@-633,2853
NetTP403_1: TP403.1 U400.17 | length 130.8
  Component Side w10: U400.17@-799.55,2888.2 -722.8,2888.2 -703,2908 TP403.1@-677,2908
NetTP500_1: TP500.1 U501.43 | length 142.6
  Component Side w5: U501.43@-115.91,5366.71 -115.91,5225.52 TP500.1@-114.91,5224.52
NetTP501_1: TP501.1 U501.41 | length 142.6
  Component Side w5: U501.41@-194.65,5366.71 -194.65,5225.52 TP501.1@-193.65,5224.52
NetTP502_1: TP502.1 U501.42 | length 78.6
  Component Side w5: U501.42@-155.28,5366.71 -155.28,5289.52 TP502.1@-154.28,5288.52
NetTP503_1: TP503.1 U501.2 | length 103.6
  Component Side w5: U501.2@-155.37,5878 -155.28,5878.09 TP503.1@-155.28,5981.52
NetTP504_1: TP504.1 U501.40 | length 78.6
  Component Side w5: U501.40@-234.02,5366.71 -234.02,5289.52 TP504.1@-233.02,5288.52
NetTP505_1: TP505.1 U501.5 | length 102.6
  Component Side w5: U501.5@-273.48,5878 -273.39,5878.09 TP505.1@-273.39,5980.52
NetTP506_1: TP506.1 U501.38 | length 78.5
  Component Side w5: U501.38@-312.76,5366.71 -312.76,5289.37 TP506.1@-311.91,5288.52
NetTP507_1: TP507.1 U501.36 | length 78.6
  Component Side w5: U501.36@-391.5,5366.71 -391.5,5289.52 TP507.1@-390.5,5288.52
NetTP508_1: TP508.1 U501.37 | length 142.6
  Component Side w5: U501.37@-352.13,5366.71 -352.13,5225.52 TP508.1@-351.13,5224.52
NetTP509_1: TP509.1 U501.35 | length 142.6
  Component Side w5: U501.35@-430.87,5366.71 -430.87,5225.52 TP509.1@-429.87,5224.52
NetTP510_1: TP510.1 U501.33 | length 142.6
  Component Side w5: U501.33@-509.61,5366.71 -509.61,5225.52 TP510.1@-508.61,5224.52
NetTP511_1: TP511.1 U501.39 | length 142.6
  Component Side w5: U501.39@-273.39,5366.71 -273.39,5225.52 TP511.1@-272.39,5224.52
NetTP512_1: TP512.1 U501.34 | length 78.6
  Component Side w5: U501.34@-470.24,5366.71 -470.24,5289.52 TP512.1@-469.24,5288.52
NetTP600_1: TP600.1 U601.5 | length 98.5
  Component Side w10: U601.5@-993.63,56.72 -960.36,56.72 TP600.1@-914.27,102.82
P\H\Y\_\I\N\T\: J201.8 R218.2 U100.A5 | length 1361.6
  Component Side w5: U100.A5@-259.03,4438.37 v1(-243.28,4454.12) ; v2(284.97,4602.39) 300.97,4618.39 300.97,4939.39 365.46,5003.89 J201.8@554,5003.89
  Inner Layer 2 w5: v1(-243.28,4454.12) -216.03,4481.37 -216.03,4487.27 v1(-194.9,4508.39) -189.53,4513.77 -174.37,4513.77 -142.03,4546.11 -142.03,4602.54 -82.17,4662.39 224.97,4662.39 v2(284.97,4602.39)
  Solder Side w5: v1@-194.09,4508.39 -182.09,4520.39 R218.2@-159.03,4520.39
REF_CLK: J202.7 U100.L3 | length 2495.1
  Component Side w5: U100.L3@-573.99,4501.36 v1(-558.24,4517.11) ; v2(479.97,4673.39) 479.97,4222.39 J202.7@552.97,4149.39
  Inner Layer 2 w5: v1(-558.24,4517.11) -589.74,4548.61 -589.74,4569.97 -605.86,4586.09 -605.86,4586.47 -614.87,4595.48 -615.24,4595.48 -774.03,4754.26 -774.03,4906.39 -666.35,5014.08 139.28,5014.08 v2(479.97,4673.39)
RX_DV: J202.9 R203.2 U100.D2 | length 1612.5
  Component Side w5: U100.D2@-353.52,4532.86 v1(-337.77,4548.61)
  Inner Layer 2 w5: v1(-337.77,4548.61) -328.02,4548.61 -311.9,4564.73 -268.41,4564.73 -258.66,4574.48 -258.66,4599.77 -226.43,4631.99 v1(-194.79,4631.99) -184.12,4631.99 -102.72,4713.39 353.97,4713.39 587.97,4479.39 587.97,4084.39 J202.9@552.97,4049.39
  Solder Side w5: v1@-193.98,4631.99 -181.98,4619.99 R203.2@-158.92,4619.99
RX_ER: J202.10 U100.N2 | length 2670
  Component Side w5: U100.N2@-636.98,4532.86 v1(-621.24,4548.61) ; v2(458.97,4725.39) 430.97,4697.39 430.97,4509.39 415.66,4494.08 415.66,4136.7 J202.10@552.97,3999.39
  Inner Layer 2 w5: v1(-621.24,4548.61) -648.11,4575.48 -648.11,4605.76 -786.03,4743.69 -786.03,4910.39 -671.03,5025.39 158.97,5025.39 v2(458.97,4725.39)
RXD0: J201.2 U100.C7 | length 1394
  Component Side w5: U100.C7@-322.02,4375.38 v1(-306.28,4391.13) ; v2(434.97,4475.39) 451.97,4492.39 451.97,4677.39 478.46,4703.89 J201.2@554,4703.89
  Inner Layer 2 w5: v1(-306.28,4391.13) -290.53,4406.87 -259.03,4406.87 -240.55,4388.39 -174.03,4388.39 -129.03,4433.39 -129.03,4601.39 -80.03,4650.39 188.97,4650.39 266.97,4572.39 363.28,4572.39 434.97,4500.7 v2(434.97,4475.39)
RXD1: J201.5 U100.A4 | length 1166.8
  Component Side w5: U100.A4@-259.03,4469.87 v1(-243.28,4485.61) ; v2(324.97,4599.54) 342.97,4617.54 342.97,4790.39 406.46,4853.89 J201.5@554,4853.89
  Inner Layer 2 w5: v1(-243.28,4485.61) -239.42,4485.61 -201.27,4523.77 -178.52,4523.77 -153.13,4549.16 -153.13,4605.58 -86.32,4672.39 252.11,4672.39 v2(324.97,4599.54)
S\C\A\S\: R136.1 U101.F7 | length 979.8
  Component Side w5: U101.F7@-1198.06,4259.87 v1(-1182.31,4275.62) ; v1(-650.85,3924.73) R136.1@-650.85,3955.39
  Inner Layer 2 w5: v1(-1182.31,4275.62) -1166.18,4291.74 -1166.18,4344.98 -1157.17,4354 -817.36,4354 -775.83,4312.47 -775.83,4049.72 v1(-650.85,3924.73)
S\M\S\: R140.1 U101.G9 | length 1054.9
  Component Side w5: U101.G9@-1135.06,4228.38 v1(-1119.32,4212.63) ; v1(-415.85,3924.73) R140.1@-415.85,3955.39
  Inner Layer 2 w5: v1(-1119.32,4212.63) -1106.69,4200 -1018.83,4200 -985.82,4166.98 -834.82,4166.98 -818.63,4150.79 -818.63,4088.52 -818.83,4088.31 -818.83,4054.47 -818.63,4054.26 -818.63,3986.79 -702.83,3871 -569.83,3871 -558.83,3882 -558.83,3898 -501.44,3955.39 -440.23,3955.39 -415.85,3931.02 v1(-415.85,3924.73)
S\R\A\S\: R138.1 U101.F8 | length 942.9
  Component Side w5: U101.F8@-1166.56,4259.87 v1(-1150.81,4275.62) ; v1(-556.85,3924.73) R138.1@-556.85,3955.39
  Inner Layer 2 w5: v1(-1150.81,4275.62) -1134.69,4259.5 -1134.69,4237.76 -1125.68,4228.75 -1101.59,4228.75 -1088.83,4216 -825.83,4216 -805.83,4196 -805.83,3996.65 -718.54,3909.36 -708.36,3899.18 -607.66,3899.18 -582.11,3924.73 v1(-556.85,3924.73)
S\W\E\: R134.1 U101.F9 | length 862.9
  Component Side w5: U101.F9@-1135.06,4259.87 v1(-1119.32,4244.13) ; v1(-603.85,3924.73) R134.1@-603.85,3955.39
  Inner Layer 2 w5: v1(-1119.32,4244.13) -1100.44,4263 -829.83,4263 -795.83,4229 -795.83,4000.79 -704.22,3909.18 -619.41,3909.18 v1(-603.85,3924.73)
SCKE: R141.1 R144.2 U101.F3 | length 1868
  Component Side w5: R144.2@-1577.19,3955.13 R144.2@-1577.19,3955.42 v1(-1577.19,3985.8) ; v1(-1339.79,4275.62) U101.F3@-1324.04,4259.87 ; v1(-462.85,3924.73) R141.1@-462.85,3955.39
  Inner Layer 2 w5: v1(-1339.79,4275.62) -1454.21,4275.62 -1577.19,4152.65 v1(-1577.19,3985.8) -1553.83,3962.44 -1553.83,3867 -1498.83,3812 -506.83,3812 -462.85,3855.98 v1(-462.85,3924.73)
SCL: R206.2 R237.2 R319.1 R327.2 R401.1 R404.1 | length 6167.6
  Component Side w5: R327.2@-377.85,1671.67 -377.57,1671.95 v1(-377.57,1702.49) R319.1@-377.57,1733.15 ; R237.2@-107.85,4570.39 -84.79,4570.39 v1(-72.79,4558.39) -60.79,4570.39 R206.2@-36.03,4570.39
  Component Side w7: R404.1@-894.12,3118.07 v2(-894.12,3152.18)
  Inner Layer 1 w5: v2(-894.12,3152.18) -894.12,3169.12 -910.96,3185.96 -945.04,3185.96 -965,3166 -965,3033.63 -1035.63,2963 -1169.63,2963 -1228,2904.63 -1228,2859 -1188,2819 -1188,2110.79 -812.21,1735 -410.08,1735 v1(-377.57,1702.49) -377.57,1675.58 -349.04,1647.06 -125.29,1647.06 -52.04,1720.3 -52.04,2302.06 273.15,2627.25 273.15,4376.1 168.86,4480.39 24.81,4480.39 -53.19,4558.39 v1(-72.79,4558.39)
  Solder Side w5: v1(-72.79,4558.39) -60.79,4570.39 R401.1@-36.03,4570.39
SCLK_CON: R312.1 R324.1 R332.2 | length 3440.5
  Component Side w5: v1@-623.04,2061.9 -623.04,1927.9 R332.2@-609.99,1914.84 ; R332.2@-597.45,1914.84 -568.67,1914.84 -559.61,1923.9 R324.1@-528.95,1923.9 ; R312.1@-108.74,4370.39 -85.28,4370.39 v1(-73.68,4381.99)
  Inner Layer 1 w5: v1@-623.04,2061.9 -623.04,2285.62 -544.61,2364.06 -103.18,2364.06 193.15,2660.39 193.15,4342.96 135.72,4400.39 -37.08,4400.39 -55.48,4381.99 v1(-73.68,4381.99)
  other v1: -622.63,2061.9
SDA: R207.2 R238.2 R320.1 R328.2 R403.1 R405.1 | length 5942.9
  Component Side w5: R328.2@-327.85,1671.67 -327.57,1671.95 v1(-327.57,1702.49) R320.1@-327.57,1733.15 ; R238.2@-107.85,4520.39 -84.79,4520.39 v1(-72.79,4508.39) -60.79,4520.39 R207.2@-36.03,4520.39
  Component Side w7: R405.1@-944.12,3118.07 v2(-944.12,3152.18)
  Inner Layer 1 w5: v2(-944.12,3152.18) -944.12,3031.88 -1029,2947 -1163,2947 -1212,2898 -1212,2865.58 -1172,2825.58 -1172,2117.41 -805.59,1751 -376.08,1751 v1(-327.57,1702.49) -327.57,1680.58 -314.04,1667.06 -133.57,1667.06 -70,1730.63 -70,2312.38 253.15,2635.53 253.15,4367.82 160.57,4460.39 -0.19,4460.39 -48.19,4508.39 v1(-72.79,4508.39)
  Solder Side w5: v1(-72.79,4508.39) -60.79,4520.39 R403.1@-36.03,4520.39
SDIO0: R510.1 U500.5 U501.16 | length 562.1
  Component Side w5: R510.1@-1116.91,6028.52 -1116.91,5907.27 -1065.52,5855.88 U500.5@-1006.91,5855.88 -927.12,5855.88 -905,5878 U501.16@-706.55,5878